# Altium PCB CarCharger.PcbDoc
Units mil, origin at the board's own origin, x right, y up, seen from the top; angles counter-clockwise.
Board outline 1968.5 x 984.25 mil, 4 copper layers (Component Side, Ground Plane, Power Plane, Solder Side), stack 87.289 mil thick; 39 components, 16 nets, 99 pads, 98 vias.
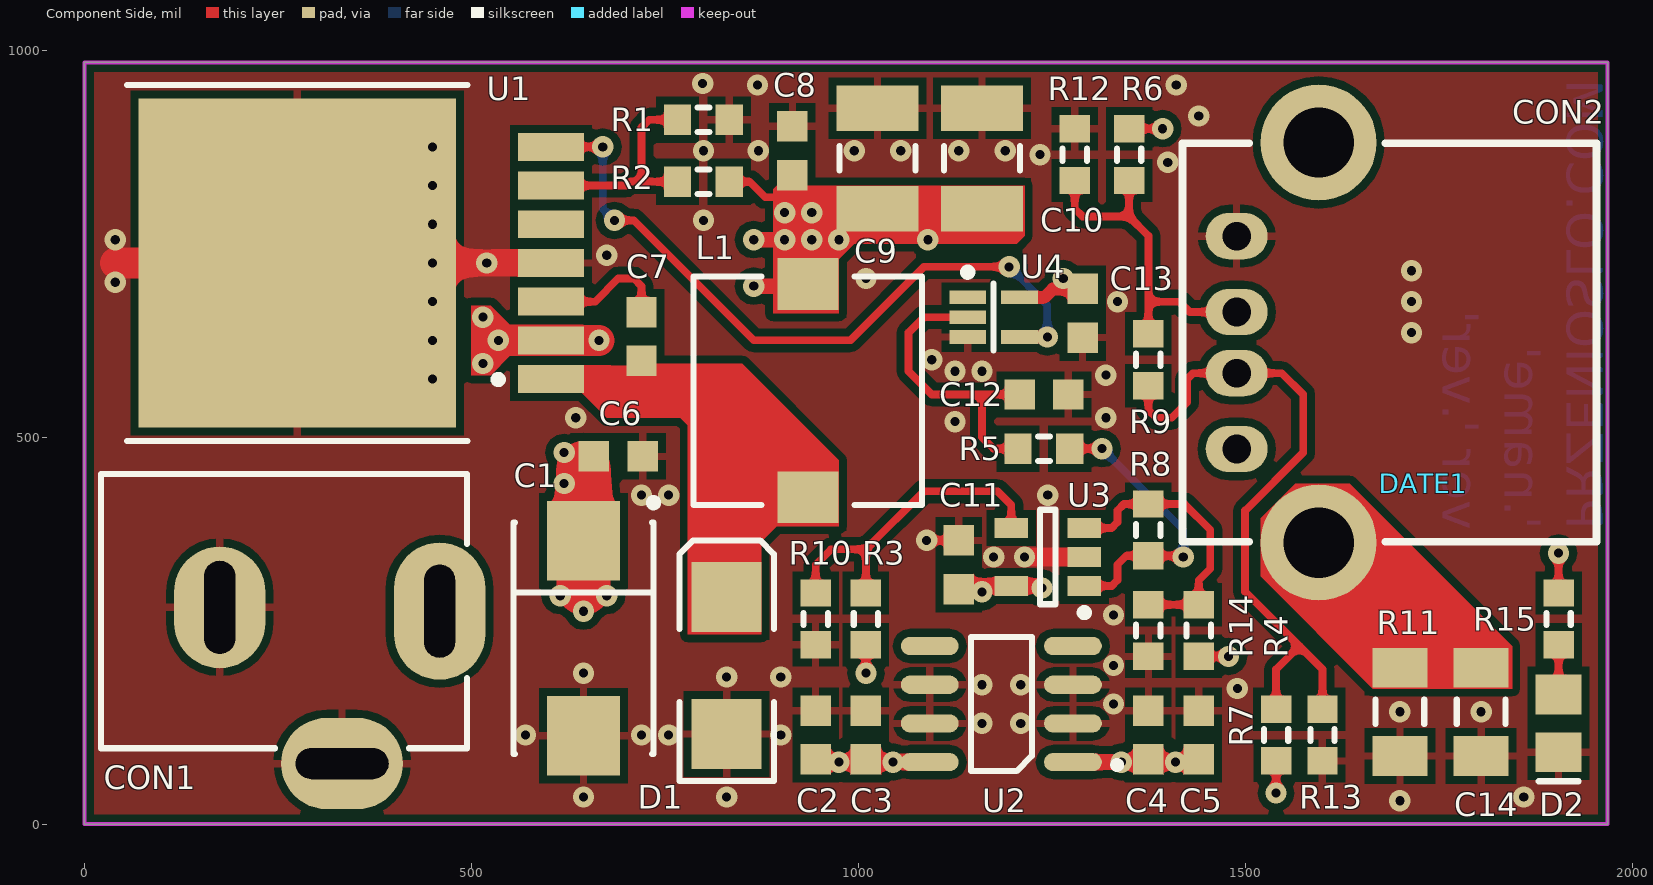
[diagram p0: Component Side view]
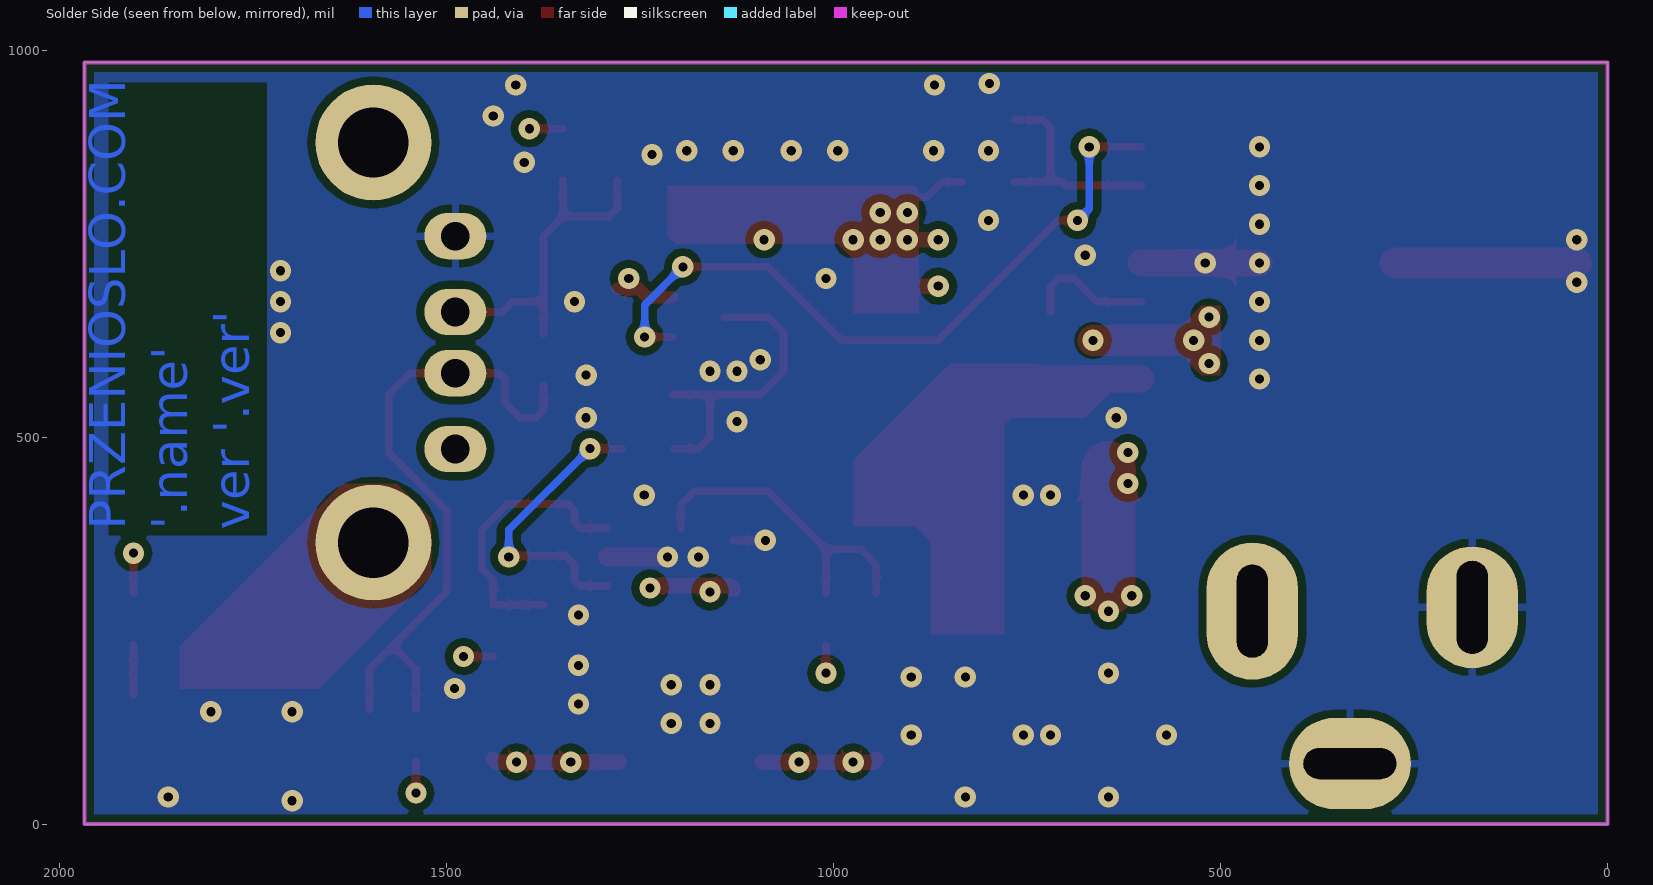
[diagram p1: Solder Side view, seen from below]
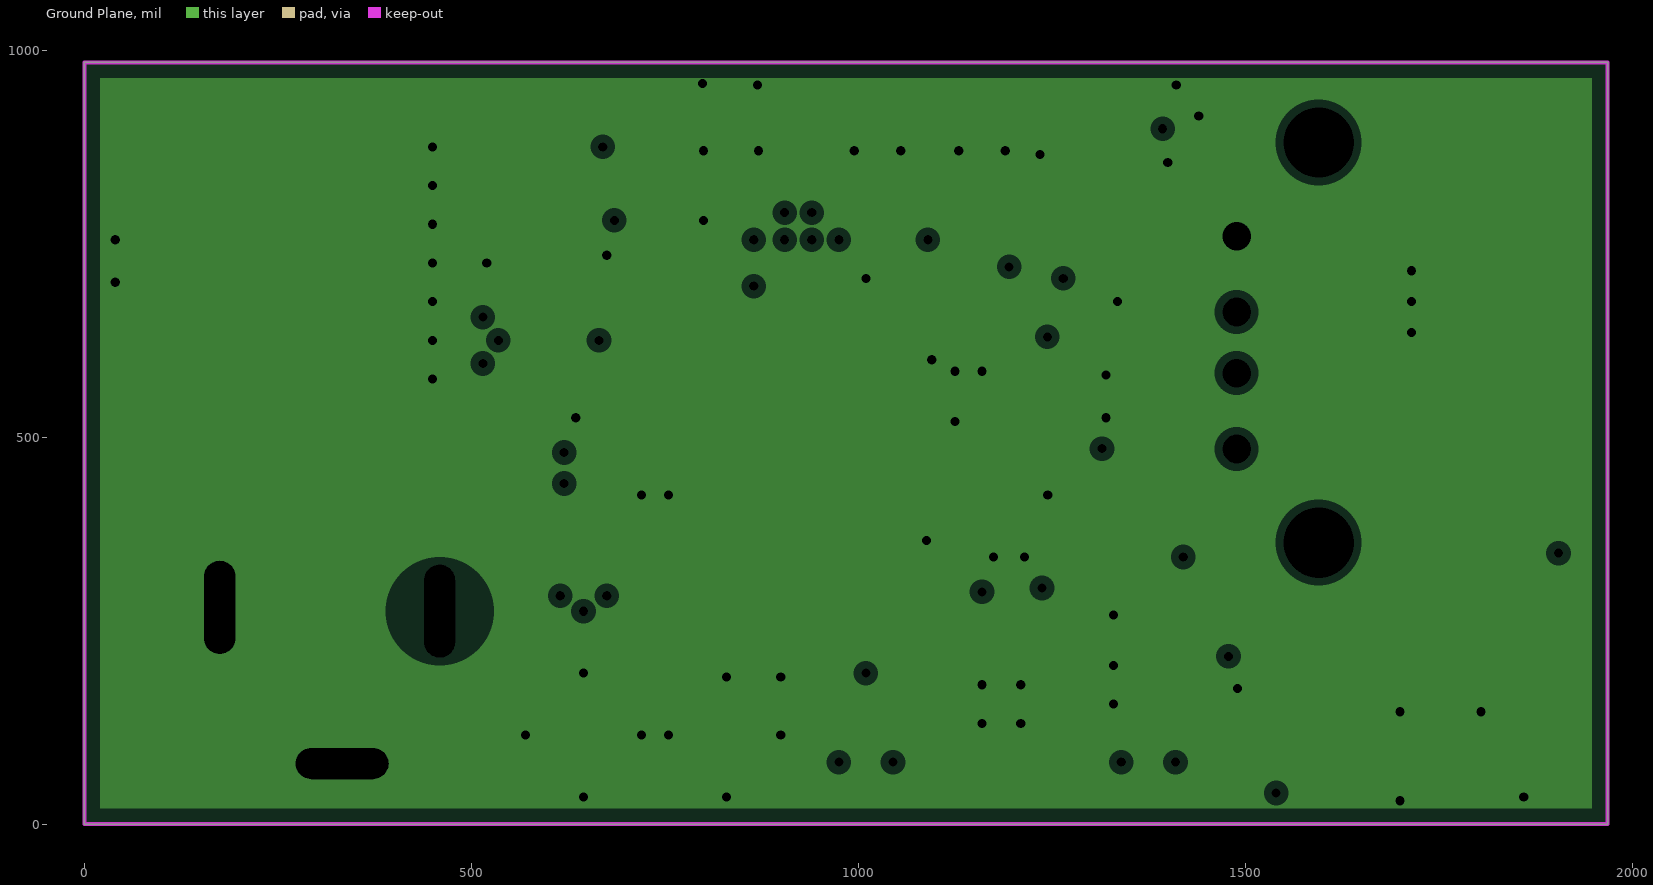
[diagram p2: Ground Plane, clearances drawn from the general rule]
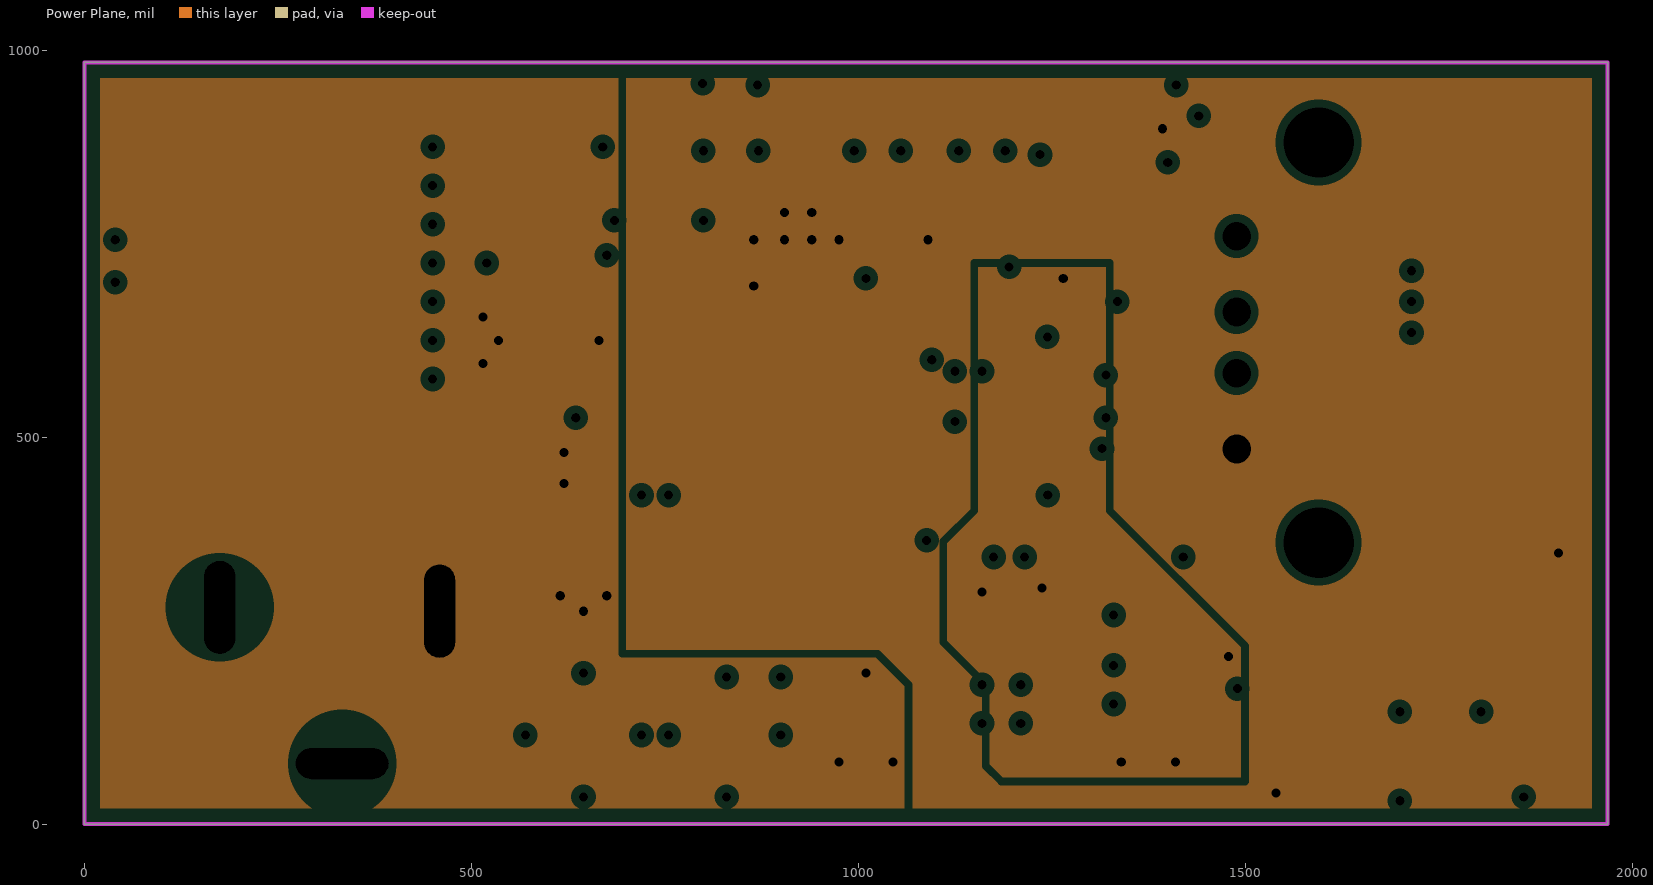
[diagram p3: Power Plane, clearances drawn from the general rule]
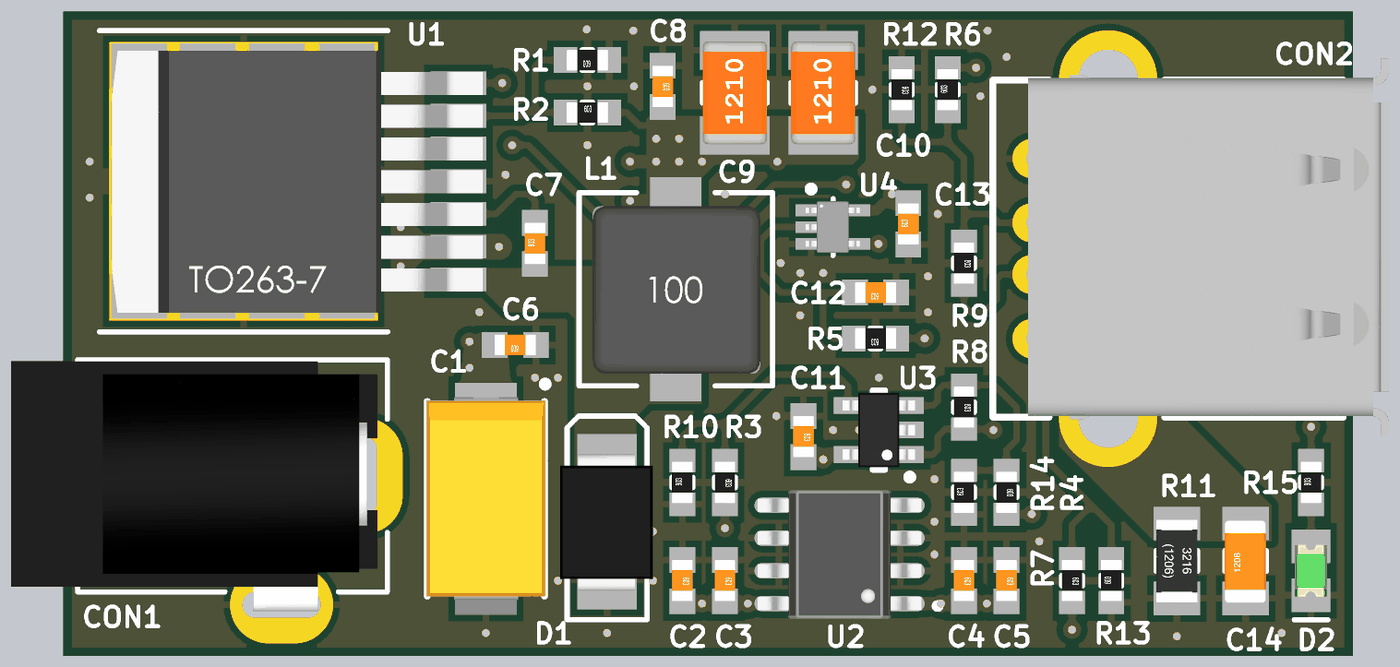
[diagram p4: 3D render of the assembled board from above, using the file's embedded part models]

## Layer stack, top to bottom
Top Solder: solder mask 0.4, Solder Resist, Dk 3.5
Component Side: signal copper 1.4
Dielectric 1: core 12.6, FR-4, Dk 4.8
Ground Plane: plane copper 1.4169, net GND
Dielectric 3: prepreg 59.0551, Dk 4.2
Power Plane: plane copper 1.4169, net (Multiple Nets)
Dielectric 4: core 10, Dk 4.2
Solder Side: signal copper 1.4
Bottom Solder: solder mask 0.4, Solder Resist, Dk 3.5

## Board outline
0,0 1968.5,0 1968.5,984.25 0,984.25

## Design rules (kind name [scope] priority, off if disabled: settings)
Clearance "Stitching GNDA" [IsStitchingVia and InNet('GNDA') vs (IsVia and (Not IsStitchingVia)) Or IsPad] p1: gap=5 ignorepadtopadclearanceinfootprint=FALSE except(0: Arc-Hole Track-Hole SMDPad-Hole THPad-Hole Via-Hole Fill-Hole Poly-Hole Region-Hole Text-Hole)
Clearance ShieldClearance_BOT [InNamedPolygon('GND_BOT') vs InNet('SHIELD')] p2: gap=30 ignorepadtopadclearanceinfootprint=FALSE except(0: Arc-Hole Track-Hole SMDPad-Hole THPad-Hole Via-Hole Fill-Hole Poly-Hole Region-Hole Text-Hole)
Clearance ANTClearance_TOP [InNamedPolygon('GND_TOP') vs InNetClass('50R')] p3: gap=13.78 ignorepadtopadclearanceinfootprint=FALSE
Clearance [All] p4: gap=7 ignorepadtopadclearanceinfootprint=TRUE except(10: Arc-Fill Arc-Poly Arc-Region Track-Fill Track-Poly Track-Region SMDPad-Fill SMDPad-Poly SMDPad-Region THPad-Fill THPad-Poly THPad-Region Via-Fill Via-Poly Via-Region Fill-Fill Fill-Poly Fill-Region Poly-Poly Poly-Region Region-Region)
DiffPairsRouting DIFF_USB [InDifferentialPair('USB')] p1: maxlimit=17.72 minlimit=7 mostfreqgap=7 toplayer_minwidth=10 toplayer_maxwidth=15.75 toplayer_prefwidth=12.99 bottomlayer_minwidth=10 bottomlayer_maxwidth=15.75 bottomlayer_prefwidth=12.99 maxuncoupledlength=500
Height [All] p1: minheight=0 maxheight=1200 prefheight=500
HoleSize [All] p1: absolutevalues=TRUE maxlimit=200 minlimit=1 maxpercent=80.000 minpercent=20.000
MatchedLengths DiffPair_100_2MatchedLengths [InNetClass('DIFF100_A')] p1: tolerance=1000 checknetsindiffpair=TRUE checkdiffpairvsdiffpair=FALSE checkxsignals=FALSE checkothers=FALSE
MatchedLengths DiffPair_100MatchedLengths [InNetClass('DIFF100_B')] p2: tolerance=5 checknetsindiffpair=TRUE checkdiffpairvsdiffpair=FALSE checkxsignals=FALSE checkothers=FALSE
MinimumSolderMaskSliver [All] p1: minsoldermaskwidth=1
PasteMaskExpansion [InNet('230V_N')] p1: expansion=20
PlaneClearance [All] p1: clearance=10
PlaneConnect Via_Thermal_Relief [IsStitchingVia Or IsVia] p1: planeconnectstyle=Direct reliefexpansion=20 reliefentries=4 reliefconductorwidth=10 reliefairgap=40
PlaneConnect ShieldConnect [InNet('SHIELD')] p2: planeconnectstyle=Relief reliefexpansion=20 reliefentries=4 reliefconductorwidth=10 reliefairgap=40
PlaneConnect [All] p3: planeconnectstyle=Relief reliefexpansion=8 reliefentries=4 reliefconductorwidth=8 reliefairgap=5
PolygonConnect GNDA_VIA_CONN [InNet('GND') And (IsStitchingVia Or IsVia)] p1: connectstyle=Direct reliefconductorwidth=10 reliefentries=4 polygonreliefangle="90 Angle" airgapwidth=10
PolygonConnect [All] p2: connectstyle=Relief reliefconductorwidth=10 reliefentries=4 polygonreliefangle="90 Angle" airgapwidth=10
RoutingVias [All] p1: holewidth=5.91 width=11.81 viastyle="Through Hole" minholewidth=5.91 minwidth=11.81 maxholewidth=500 maxwidth=1000
SilkToSilkClearance [All] p1: silktosilkclearance=5
SilkToSolderMaskClearance SilkscreenOverComponentPads [IsPad] p1: minsilkscreentomaskgap=1 clearancetoexposedcopper=TRUE
SolderMaskExpansion [InNet('230V_N')] p1: expansion=5
Width ANT [InNetClass('50R')] p1: maxlimit=23.43 minlimit=23.43 preferedwidth=23.43
Width GND [InNet('GND')] p2: maxlimit=100 minlimit=8 preferedwidth=50
Width 3V3 [InNet('3V3')] p3: maxlimit=40 minlimit=8 preferedwidth=30
Width 5V [InNet('5V')] p4: maxlimit=90 minlimit=10 preferedwidth=60
Width 24V [InNet('24V')] p5: maxlimit=80 minlimit=10 preferedwidth=60
Width [All] p6: maxlimit=100 minlimit=6 preferedwidth=8
21 further rules are at their usual default settings.

## Components (designator, comment, footprint, x,y, rotation, side; value= is the part's Value field where it differs from the comment)
C1 "47uF" SMDD 645,240 r270 top
C2 "1uF" CAPC1608N 945,115 r270 top
C3 "100nF" CAPC1608N 1010,115 r270 top
C4 "100nF" CAPC1608N 1375,115 r270 top
C5 "1uF" CAPC1608N 1440,115 r270 top
C6 "100nF" CAPC1608N 690,475 r180 top
C7 "100nF" CAPC1608N 720,630 r90 top
C8 "100nF" CAPC1608N 915,870 r270 top
C9 "100uF" CAPC3225N 1025,860 r90 top
C10 "100uF" CAPC3225N 1160,860 r90 top
C11 "100nF" CAPC1608N 1130,335 r270 top
C12 "10uF" CAPC1608N 1240,555 r180 top
C13 "100nF" CAPC1608N 1290,660 r90 top
C14 "2n2" CAPC3216N 1805,145 r90 top
CON1 "1613 21" JACK-2.5 317.05,179.07 r0 top locked
CON2 "67643-3910" USB-A-SOCKET 1542,622.13 r180 top
D1 "SK210" SMB 830,205 r90 top
D2 "Led Green" CD2012-0805-GRN 1905,130 r270 top
DATE1 "DATE" DATE 1730,440 r90 top
L1 "DR74-330-R" "DR74 Series" 935,560 r90 top value=33uH
R1 "1k" RESC1608N 800,910 r180 top
R2 "3k3" RESC1608N 800,830 r0 top
R3 "390k" RESC1608N 1010,265 r270 top
R4 "100k" RESC1608N 1440,250 r270 top
R5 "200k" RESC1608N 1240,485 r180 top
R6 "30k" RESC1608N 1350,865 r90 top
R7 "30k" RESC1608N 1540,115 r270 top
R8 "1M8" RESC1608N 1375,380 r270 top
R9 "open" RESC1608N 1375,600 r270 top
R10 "97k6" RESC1608N 945,265 r90 top
R11 "10M" RESC3216N 1700,145 r90 top
R12 "20k" RESC1608N 1280,865 r270 top
R13 "20k" RESC1608N 1600,115 r90 top
R14 "240k" RESC1608N 1375,250 r90 top
R15 "620R" RESC1608N 1905,265 r90 top
U1 "LM2676S-ADJ" TO-263-7 360.26,725 r90 top
U2 "L78L33ABD-TR" SO-8_L 1185,155 r180 top
U3 "MCP6001T-I/OT" SOT23-5_N 1245,345 r180 top
U4 "NC7SP04P5X" sc70 1175,655 r0 top

## Footprints (in the part's own frame and the unit in brackets; to place one, negate y for a bottom-side part, rotate by r counter-clockwise, add the part's x,y. Pads: shape width x height; smd on the part's side, far side on the other; paste and mask are expansions set on the pad)
CAPC1608N [mm] "Chip Capacitor, Body 1.6x0.8mm, IPC Medium Density"
  rect 1x1 smd: 1(-0.8,0) 2(0.8,0)
  body extent -0.8,-0.4 0.8,0.4, height 0.3
CAPC3216N [mm] "Chip Capacitor, Body 3.2x1.6mm, IPC Medium Density"
  rect 1.3x1.8 smd: 1(-1.45,0) 2(1.45,0)
  silkscreen extent -0.4,-0.8 0.4,0.8, body extent -1.63,-0.79 1.57,0.81, height 1
CAPC3225N [mm] "Chip Capacitor, Body 3.2x2.5mm, IPC Medium Density"
  rect 1.5x2.7 smd: 1(-1.65,0) 2(1.65,0)
  silkscreen extent -0.4,-1.25 0.4,1.25, body extent -2,-1.24 2,1.24, height 1.7
CD2012-0805-GRN [mm] "Chip Diode; Body 2.0 x 1.3 mm (LxW typ)"
  rect 1.3x1.5 smd: 1(-0.95,0) 2(0.95,0)
  silkscreen extent 1.9,-0.65 1.9,0.65, body extent -1.01,-0.64 1.01,0.61, height 1.1
DATE [mil] "Obszar do nadruku datowania"
"DR74 Series" [mm] "Chip Inductor, 2-Leads, Body 7.6x7.6mm, IPC High Density"
  rect 1.7x2 smd: 1(-3.5,0) 2(3.5,0)
  silkscreen extent -3.75,-3.75 3.75,3.75, body extent -3.27,-3.27 3.22,3.22, height 4.8
JACK-2.5 [mm] "DC Power Jack, 2.5mm, KLD Series, PCB Mount"
  oval 3x4.5 hole 1.016 slot 3.048 at 90 deg: 1(3.608,2.437)
  oval 3x4 hole 1.016 slot 3.048 at 90 deg: 2(-3.608,2.564)
  oval 4x3 hole 1.016 slot 3.048 at 0 deg: 3(0.408,-2.564)
  silkscreen extent -7.5,-2.06 4.51,6.94, body extent -10.08,-2.82 4.12,6.88, height 10.85
RESC1608N [mm] "Chip Resistor, Body 1.6x0.8mm, IPC Medium Density"
  rect 0.9x1 smd: 1(-0.85,0) 2(0.85,0)
  silkscreen extent -0.2,-0.4 0.2,0.4, body extent -0.8,-0.4 0.8,0.4, height 0.3
RESC3216N [mm] "Chip Resistor, Body 3.2x1.6mm, IPC Medium Density"
  rect 1.3x1.8 smd: 1(-1.45,0) 2(1.45,0)
  silkscreen extent -0.4,-0.8 0.4,0.8, body extent -1.6,-0.8 1.6,0.8, height 0.55
sc70 [mm] "SOT23, 5-Leads, Body 2.2x2.4mm (max), Pitch 0.65mm, IPC Medium Density"
  rect 1.2x0.45 smd: 1(-0.85,0.65) 2(-0.85,0) 3(-0.85,-0.65) 4(0.85,-0.65) 5(0.85,0.65)
  silkscreen extent -0.97,-1.1 0,1.6, body extent -1.06,-1 1.04,1, height 0.92
SMB [mm] "DO-214-AA/SMB; 2 C-Bend Leads; Body 5.3 x 3.6 mm, inc. leads (LxW)"
  rect 2.3x2.3 smd: 1(-2.25,0) 2(2.25,0)
  silkscreen extent -3.8,-1.55 4.1,1.55, body extent -2.67,-1.77 2.63,1.83, height 2.4
SMDD [mm] "Capacitor, SM Tantalum; Body 7.3 x 4.3 mm (LxW typ)"
  rect 2.6x2.4 smd: 1(-3.2,0) 2(3.2,0)
  silkscreen extent -4.57,-2.3 3.8,2.43, body extent -4.5,-2.3 4.5,2.31, height 3.1
SO-8_L [mm] "8-Pin Small Outline Integrated Circuit 1.27 mm Pitch, IPC High Density"
  oval 1.9x0.6 smd: 1(-2.35,1.905) 2(-2.35,0.635) 3(-2.35,-0.635) 4(-2.35,-1.905) 5(2.35,-1.905) 6(2.35,-0.635) 7(2.35,0.635) 8(2.35,1.905)
  silkscreen extent -3.9,-2.2 1,2.2, body extent -3.17,-2.5 3.17,2.5, height 1.88
SOT23-5_N [mm] "SOT23, 5-Leads, Body 2.9x1.6mm, Pitch 0.95mm, Lead Span 2.8mm, IPC Medium Density"
  rect 1.1x0.65 smd: 1(-1.2,0.95) 2(-1.2,0) 3(-1.2,-0.95) 4(1.2,-0.95) 5(1.2,0.95)
  silkscreen extent -1.33,-1.55 0.25,1.95, body extent -1.4,-1.45 1.4,1.45, height 1.45
TO-263-7 [mil] "D2-PAK/TO-263-AB; 7 Leads (1 Cropped); Body 15.9 (inc. leads) x 10.4 mm (LxW max)"
  rect 36x85 smd: 1(-150,-242.74) 2(-100,-242.74) 3(-50,-242.74) 4(0,-242.74) 5(50,-242.74) 6(100,-242.74) 7(150,-242.74)
  rect 425x410 smd paste-400: TAB(0,85.26)
  silkscreen extent -230,-180 230,305, body extent -201,-280 199,286, height 179
USB-A-SOCKET [mil]
  oval 80x60 hole 37: 1(53,137.5) 2(53,39.5) 3(53,-39.5) 4(53,-137.5)
  round 150 hole 91: 5(-53,258.5) 5(-53,-258.5)
  silkscreen extent -412,-258 123,258, body extent -482,-290 69,285, height 293

## Part data
C1: library part cap_electro, Tolerance=10%, Voltage=35V, manid=T491X476K035AT
C2 C5: library part Capacitor, "Capacitor", Tolerance=10%, Voltage=25V
C3 C4 C6 C7 C8 C11 C13: library part Capacitor, "Capacitor", Tolerance=5%, Voltage=25V
C9 C10: library part Capacitor, "Capacitor", Tolerance=20%, Voltage=10V
C12: library part Capacitor, "Capacitor", Tolerance=20%, Voltage=6V3
C14: library part Capacitor, "Capacitor", Tolerance=10%, Voltage=500V
CON1: library part JACK-2.5, "Low Voltage Power Supply Connector", manid="1613 21"
CON2: library part USB-A-Sock, "USB-A-Sock", manid=67643-3910
D1: library part MBRS340T3, "Schottky Barrier Rectifier,  40V, 3A", PackageReference=SMC, tme.pl=MBRS340T3
D2: "Typical GRN LED", Current=10mA, manid=LTST-C170GKT
L1: PackageDocument=Sep-1998, ComponentLink1Description="Manufacturer Link", ComponentLink2Description=Datasheet, Distributor=tme.pl, elfa.se=58-101-14, Published=8-Jun-2000, Publisher="Altium Limited"
R1 R2 R3 R4 R5 R6 R7 R8 R10 R12 R13 R14 R15: library part Resistor, "Resistor", Power=0W1, Tolerance=1%
R9: library part Resistor, "Resistor", Power=0W, Tolerance=5%
R11: library part Resistor, "Resistor", Power=0W25, Tolerance=5%
U1: "SIMPLE SWITCHER High Efficiency 3A Step-Down Voltage Regulator", ComponentLink1Description="Manufacturer Link", ComponentLink1URL=http://www.national.com/, ComponentLink2Description=Datasheet, ComponentLink2URL=http://www.national.com/ds.cgi/LM/LM2676.pdf, Distributor=tme.pl, elfa.se=73-068-81, farnell=1469211, manid=LM2676S-ADJ
U2: library part L78LXXAXD, "Positive voltage regulators", manid=L78L33ABD-TR, VOUT=3V3
U3: library part MCP6001, "1 MHz, Low-Power Op Amp", manid=MCP6001T-I/OT
U4: library part NC7SP04, "tiny logic inverter", manid=NC7SP04P5X

## Via types
v1: diameter 27.56, hole 11.81, Component Side to Solder Side, tented both sides, 98 vias

## Nets (pads, with @x,y where several pads share a name; then routed paths per layer and width w, separated by ;. In a path a pad name is that pad's centre, name@x,y a point inside that pad or via, vN(x,y) a via of type N, cw(c..) or ccw(c..) an arc to the next point about the centre after c; other vN are vias at no path point)
3V3: C4.2 C5.2 C11.2 C13.2 R4.2 U2.1 U3.5 U4.5 | length 387.7
  Component Side w10: R4.2 v1(1478.46,216.54)
  Component Side w16: U4.5 1240.59,680.59 1251.5,691.5 C13.2@1280,691.5
  Component Side w20: C11.2 1134.09,307.6 U3.5 v1@1237.6,307.6 ; U2.1 1436.5,80 C5.2
  other v1: 1340,80 1410,80 1160,300 1237.6,305 1265,705
5V: C8.2 C9.1 C10.1 CON2.1 L1.2 R2.2 R6.2 R7.2 R15.2 | length 296.4
  Component Side w10: R2.2 860,830 880,810 905,810 ; R6.2 v1(1393.46,898.46) ; v1(1540,40) R7.2 ; R15.2 v1(1905,350)
  Component Side w20: v1(865,695) L1.2@905,695 ; v1(865,755) v1(905,755)
  other v1: 940,755 975,755 1090,755 905,790 940,790
D+: CON2.3 R6.1 R9.1 R12.2 | length 438.6
  Component Side w10: R12.2 1280,795 1290,785 1350,785 ; R6.1 1350,785 ; R9.1 1375,675 ; CON2.3 1428.37,661.63 1415,675 1375,675 ; 1350,785 1375,760 1375,675
D-: CON2.2 R7.1 R9.2 R13.2 | length 861.5
  Component Side w10: R9.2 1375,535 1385,525 1405,525 1425,545 1425,575 1432.63,582.63 CON2.2 1547.37,582.63 1575,555 1575,480 1500,405 1500,300 1570,230 ; R7.1 1540,200 1570,230 ; R13.2 1600,200 1570,230
FB: R1.2 R2.1 U1.6 | length 286.3
  Component Side w10: U1.6 700,825 705,830 720,830 ; R2.1 720,830 ; R1.2 730,910 720,900 720,830
GND: C1.2 C2.1 C3.1 C4.1 C5.1 C6.1 C8.1 C9.2 C10.2 C11.1 C12.1 C13.1 C14.1 CON1.2 CON1.3 CON2.4 D1.1 D2.2 R1.1 R10.1 R11.1 R12.1 R13.1 R14.1 U1.4 U1.TAB U2.2 U2.3 U2.6 U2.7 U3.2 U4.3 | length 506.7
  Component Side w10: v1(1088.5,366.5) C11.1
  Component Side w25: v1(1215,345) U3.2
  Component Side w35: v1(450,725) U1.4
  Component Side w40: 40,725 U1.TAB
  other v1: 1700,30 645,35 830,35 1860,35 570,115 720,115 755,115 900,115 1160,130 1210,130 1700,145 1805,145 1330,155 1490,175 1160,180 1210,180 830,190 900,190 645,195 1330,205 1330,270 1175,345 720,425 755,425 1245,425 1125,520 635,525 1320,525 450,575 1320,580 1125,585 1160,585 1095,600 450,625 1715,635 450,675 1335,675 1715,675 40,700 1010,705 1715,715 520,725 675,735 40,755 450,775 800,780 450,825 1400,855 1235,865 800,870 871,870 995,870 1055,870 1130,870 1190,870 450,875 1440,915 870,955 1411,955 799,957
NetC7_1: C7.1 D1.2 L1.1 U1.1 | length 177
  Component Side w35: U1.1 780,575
NetC7_2: C7.2 U1.3 | length 167.1
  Component Side w10: U1.3 660,675 690,705 710,705 720,695 C7.2
NetC12_2: C12.2 R5.2 U4.2 | length 398.5
  Component Side w10: U4.2 1085,655 1065,635 1065,585 1095,555 1160,555 ; R5.2 1175,485 1160,500 1160,555 ; C12.2 1160,555
NetD2_1: D2.1 R15.1 | length 64.1
  Component Side w10: D2.1 R15.1
NetR3_1: R3.1 R10.2 U3.4 | length 422.4
  Component Side w10: R10.2 945,335 965,355 1010,355 ; R3.1 1010,355 ; U3.4 1197.76,412.24 1180,430 1085,430 1010,355
NetR4_1: R4.1 R8.1 R14.2 U3.3 | length 366
  Component Side w10: U3.3 1327.4,382.4 1335,390 1335,405 1343.46,413.46 R8.1 1421.54,413.46 1455,380 1455,330 1440,315 R4.1 R14.2
NetR5_1: R5.1 R8.2 U3.1 | length 381.3
  Component Side w10: R5.1 v1(1315,485) ; U3.1 1327.6,307.6 1335,315 1335,335 1346.54,346.54 R8.2 1418.46,346.54 v1(1420,345)
  Solder Side w10: v1(1315,485) 1420,380 v1(1420,345)
NetU1_7: U1.7 U4.4 | length 928.8
  Component Side w10: U1.7 v1(670,875) ; v1(685,780) 710,780 865,625 990,625 1085,720 v1(1195,720) ; U4.4 v1(1244.41,629.41)
  Solder Side w10: v1(670,875) 670,795 v1(685,780) ; v1(1195,720) 1244.41,670.59 v1(1244.41,629.41)
SH: C14.2 CON2.5 R11.2
VIN: C1.1 C2.2 C3.2 C6.2 CON1.1 R3.2 U1.2 U2.8 | length 402.5
  Component Side w10: v1(1010,195) R3.2
  Component Side w20: C2.2 948.5,80 U2.8
  Component Side w40: U1.2 v1(665,625)
  Component Side w70: 645,305 C1.1 C6.2@645,460
  other v1: 975,80 1045,80 645,275 615,295 675,295 620,440 620,480 515,595 535,625 515,655
pads on no net: U1.5 U2.4 U2.5 U4.1

## Polygon pours and split planes (outlines as drawn)
GND on Component Side "GND_TOP" (solid, pour order 0): 0,984.25 1968.5,984.25 1968.5,0 0,0
GND on Solder Side "GND_BOT" (solid, pour order 2): 0,984.25 1968.5,984.25 1968.5,0 0,0
GND on Ground Plane (split plane): 1948.41,20.1 20.1,20.1 20.1,964.16 1948.41,964.16
3V3 on Power Plane (split plane): 1319.9,405 1320.29,403.05 1321.4,401.4 1494.9,227.89 1494.9,60.1 1187.11,60.1 1170.1,77.11 1170.1,180 1169.71,181.95 1168.6,183.6 1115.1,237.11 1115.1,362.89 1153.6,401.4 1154.71,403.05 1155.1,405 1155.1,719.9 1319.9,719.9
5V on Power Plane (split plane): 1948.41,20.1 1070.1,20.1 1070.1,180 1069.71,181.95 1068.6,183.6 1028.6,223.6 1026.95,224.71 1025,225.1 700.1,225.1 700.1,964.16 1948.41,964.16
VIN on Power Plane (split plane): 689.9,220 690.29,218.05 691.4,216.4 693.05,215.29 695,214.9 1022.89,214.9 1059.9,177.89 1059.9,20.1 20.1,20.1 20.1,964.16 689.9,964.16

## Keep-outs
Keep-Out Layer:
  the board outline again, w5

## Other copper
Component Side:
  region net VIN: 645,645 550,645 525,670 500,670 500,610 645,610
  region net VIN: 645,605 550,605 525,580 500,580 500,610 645,610
  region net NetC7_1: 640,560 675,525 775,525 775,560
  region net 5V: 890,660 890,820 895,825 1215,825 1215,760 1205,750 995,750 975,730 975,660
  region net SH: 1845,175 1845,230 1635,440 1565,440 1520,395 1520,320 1665,175
  region net NetC7_1: 735,560 780,515 780,245 875,245 875,365 895,385 975,385 975,470 850,595 735,595
Solder Side:
  text "PRZENIOSLO.COM / '.name' / ver '.ver'" at 1740,380 h80 r270
Power Plane (plane layer: these items are gaps in the copper):
  lines w10: 695,984.25 695,220 1025,220 1065,180 1065,0 ; 1110,235 1110,365 1150,405 1150,725 1325,725 1325,405 1500,230 1500,55 1185,55 1165,75 1165,180 1110,235

## Dimensions
0,984.25 to 0,0 on Mechanical 15
0,984.25 to 1968.5,984.25 on Mechanical 15

## Text inside footprints (layer, text, board x,y; h text height)
DATE1: Mechanical 1 "DATA" at 1854,505 h60 r90